# Altium PCB 小车新电机控制PCB.PcbDoc
Units mil, origin at the board's own origin, x right, y up, seen from the top; angles counter-clockwise.
Board outline 6000 x 4000 mil, 2 copper layers (Top Layer, Bottom Layer); 51 components, 50 nets, 231 pads, 17 vias.
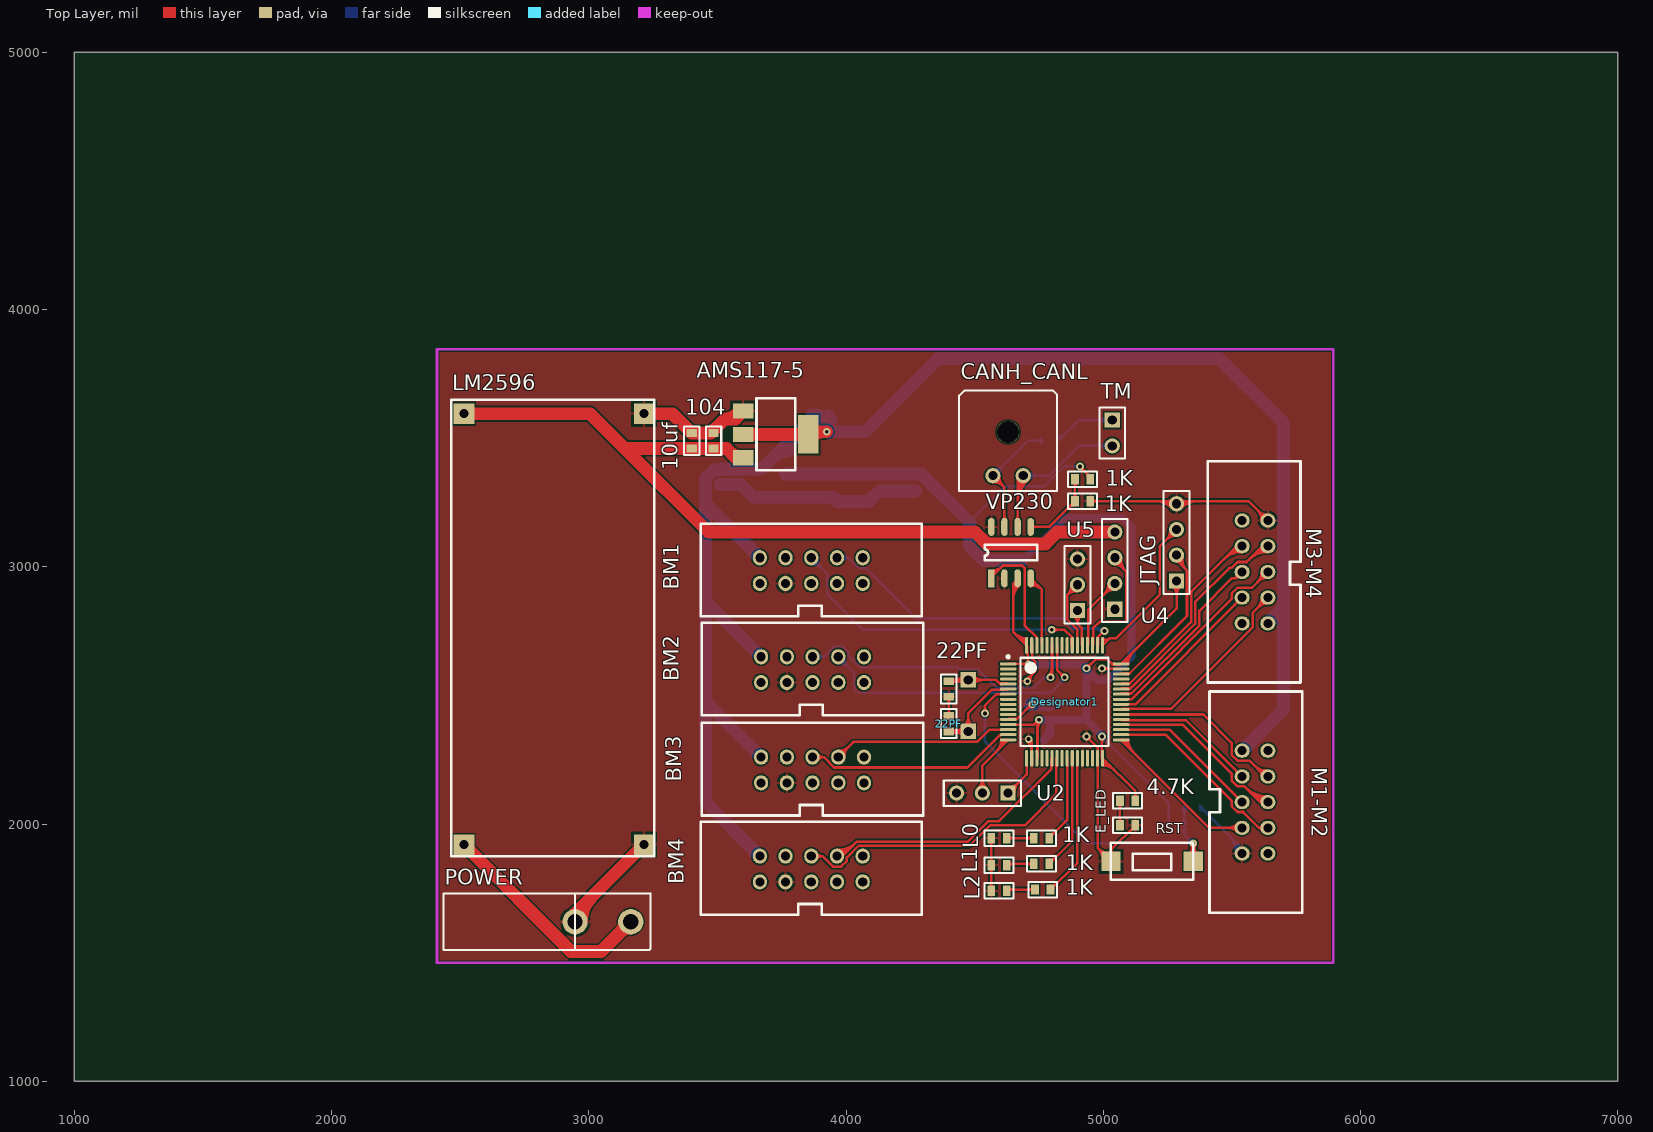
[diagram p0: Top Layer view]
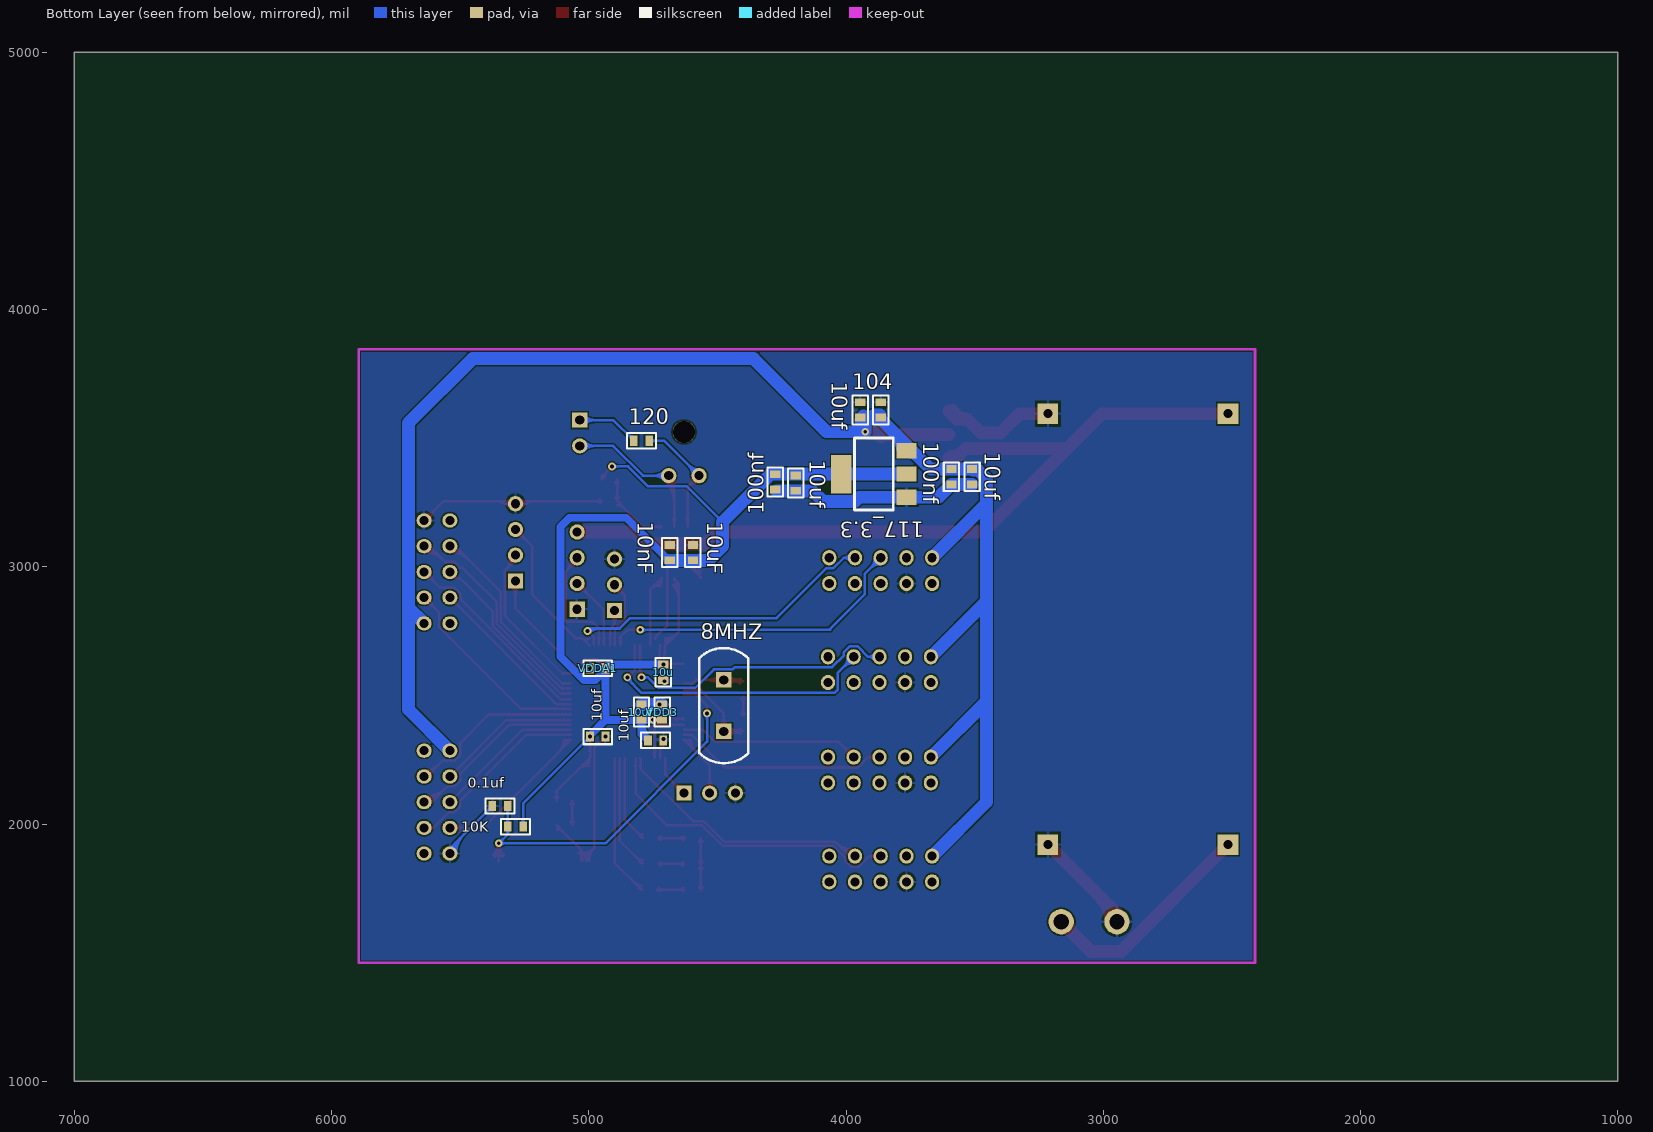
[diagram p1: Bottom Layer view, seen from below]

## Layer stack, top to bottom
Top Solder: solder mask 0.4, Solder Resist, Dk 3.5
Top Layer: signal copper 1.4
Dielectric 1: dielectric 12.6, FR-4, Dk 4.8
Bottom Layer: signal copper 1.4
Bottom Solder: solder mask 0.4, Solder Resist, Dk 3.5

## Board outline
1000,1000 7000,1000 7000,5000 1000,5000

## Design rules (kind name [scope] priority, off if disabled: settings)
Clearance [All] p1: gap=5.98
PolygonConnect [All] p1: connectstyle=Relief reliefconductorwidth=10 reliefentries=4 polygonreliefangle="90 Angle" airgapwidth=10
RoutingVias [All] p1: holewidth=20 width=30 viastyle="Through Hole" minholewidth=15 minwidth=25 maxholewidth=30 maxwidth=30
SolderMaskExpansion [All] p1: expansion=4
Width [All] p1: maxlimit=50 minlimit=10 preferedwidth=10
29 further rules are at their usual default settings.

## Classes and differential pairs
component class STM32电机: 0.1uf 1K 4.7K 8MHZ 10K 10nF 10uF 10uf 22PF 100nf 104 117_3.3 120 AMS117-5 BM1 BM2 BM3 BM4 CANH_CANL E_LED JTAG L0 L1 L2 LM2596 M1-M2 M3-M4 POWER RST TM U2 U4 U5 VDD3 VDDA1 VP230

## Components (designator, comment, footprint, x,y, rotation, side; value= is the part's Value field where it differs from the comment)
0.1uf "0.1uf" 0603_WYH 5345,2070 r0 bottom (schematic designator C_RST_0.1uf)
1K "10K" 0603_WYH 4765,1745 r180 top (schematic designator LS2_1K)
1K "10K" 0603_WYH 4760,1845 r180 top (schematic designator LS1_1K)
1K "10K" 0603_WYH 4760,1945 r180 top (schematic designator LS0_1K)
1K "1k" 0603_WYH 4920,3255 r0 top (schematic designator CANR2)
1K "1k" 0603_WYH 4920,3340 r0 top (schematic designator CANR1)
4.7K "4.7K" 0603_WYH 5095,2090 r0 top (schematic designator R_LED_4.7K)
8MHZ "XTAL" XTAL_D 4475,2560 r270 bottom
10K "R_10K" 0603_WYH 5285,1990 r0 bottom (schematic designator R_RST_10K)
10nF "10nF" 0603_WYH 4685,3055 r270 bottom (schematic designator C_CAN_10nF)
10u "100nf" 0603_WYH 4710,2590 r270 bottom (schematic designator VDD1)
10uf "100nf" 0603_WYH 4965,2340 r180 bottom (schematic designator VDDA2)
10uf "100nf" 0603_WYH 4740,2325 r180 bottom (schematic designator VDD4)
10uf "100nf" 0603_WYH 4795,2435 r90 bottom (schematic designator VDD2)
10uF "10uF" 0603_WYH 4595,3055 r270 bottom (schematic designator C_CAN_10uF)
10uf "10uF" 0603_WYH 3945,3610 r90 bottom (schematic designator "C4 10uf")
10uf "10uF" 0603_WYH 3400,3490 r90 top (schematic designator "C3 10uf")
10uf "10uf" 0603_WYH 3510,3350 r270 bottom (schematic designator C6_10uf)
10uf "10uf" 0603_WYH 4194.96,3325 r270 bottom (schematic designator C4_10uf)
22PF "22pf" 0603_WYH 4400,2390 r270 top (schematic designator C2_22PF)
22PF "22pf" 0603_WYH 4400,2525 r90 top (schematic designator C1_22PF)
100nf "C_100nf" 0603_WYH 3590,3350 r270 bottom (schematic designator C7_100nf)
100nf "C_100nf" 0603_WYH 4275,3330 r270 bottom (schematic designator C5_100nf)
104 "100nF" 0603_WYH 3865.04,3610 r90 bottom (schematic designator "C4 104")
104 "100nF" 0603_WYH 3485,3490 r90 top (schematic designator "C3 104")
117_3.3 "1117_WYN" SOT-223_WYN 3765,3270 r90 bottom (schematic designator 1117_3.3)
120 "R_120" 0603_WYH 4795,3490 r0 bottom (schematic designator R6_120)
AMS117-5 "1117-3.3" SOT-223_WYN 3600,3605 r270 top
BM1 "2*5BM" JTAG_10to20 3865,2935 r90 top
BM2 "2*5BM" JTAG_10to20 3870,2550 r90 top
BM3 "2*5BM" JTAG_10to20 3870,2160 r90 top
BM4 "2*5BM" JTAG_10to20 3865,1775 r90 top
CANH_CANL "CAN_HEADER" CAN信号 4630,3295 r90 top
Designator1 "Comment" STM32TSQFP50P1200X1200X160-64N 4850,2475 r0 top
E_LED "LED_WYN" 0603_WYH 5095,1995 r0 top
JTAG "2_JTAG" 2_JTAG 5285,2945 r90 top
L0 "LED_WYN" 0603_WYH 4595,1945 r180 top
L1 "LED_WYN" 0603_WYH 4595,1840 r180 top
L2 "LED_WYN" 0603_WYH 4595,1740 r180 top
LM2596 "LM2596" LM2596 2515,1925 r90 top
M1-M2 "M1-M2" JTAG_10to20 5540,2085 r0 top
M3-M4 "M3-M4" JTAG_10to20 5640,2980 r180 top
POWER "power" power 2435,1620 r0 top
RST "RST_BUTTON" CLCK 5350,1855 r180 top (schematic designator RST_BUTTON)
TM "Header2" HDR1X2 5035,3570 r270 top
U2 "三针串口" HDR1X3 4530,2120 r180 top
U4 "Header-4" HDR1X4 5045,2835 r90 top (schematic designator USART4)
U5 "Header-3" HDR1X3 4900,2930 r90 top (schematic designator USART5)
VDD3 "10uf" 0603_WYH 4715,2435 r90 bottom
VDDA1 "10uf" 0603_WYH 4965,2605 r0 bottom
VP230 "VP230" VP230 4565,2955 r90 top

## Footprints (in the part's own frame and the unit in brackets; to place one, negate y for a bottom-side part, rotate by r counter-clockwise, add the part's x,y. Pads: shape width x height; smd on the part's side, far side on the other; paste and mask are expansions set on the pad)
2_JTAG [mm]
  rect 1.5x1.5 hole 0.9: 1(0,0)
  round 1.5 hole 0.9: 2(2.54,0) 3(5.08,0) 4(7.62,0)
  silkscreen extent -1.27,-1.27 8.89,1.27
0603_WYH [mil]
  rect 30x40 smd: 1(-30,0) 2(30,0)
  silkscreen extent -56,-30 56,30
CAN信号 [mm]
  round 1.5 hole 0.9: 1(1.5,1.5) 2(1.5,-1.5)
  round 2.2 hole 2.2: 3(5.82,0)
  silkscreen extent 0,-4.83 9.91,4.83
CLCK [mil]
  rect 75x75 smd: 1(0,0) 2(320,0)
  silkscreen extent 0,-72 320,72
HDR1X2 [mm]
  rect 1.5x1.5 hole 0.9: 1(0,0)
  round 1.5 hole 0.9: 2(2.54,0)
  silkscreen extent -1.27,-1.27 3.81,1.27
HDR1X3 [mm] "Connector; Header; 3 Position"
  rect 1.5x1.5 hole 0.9: 1(-2.54,0)
  round 1.5 hole 0.9: 2(0,0) 3(2.54,0)
  silkscreen extent -3.81,-1.27 3.81,1.27
HDR1X4 [mm] "Connector; Header; 4 Position"
  rect 1.5x1.5 hole 0.9: 1(0,0)
  round 1.5 hole 0.9: 2(2.54,0) 3(5.08,0) 4(7.62,0)
  silkscreen extent -1.27,-1.27 8.89,1.27
JTAG_10to20 [mil]
  oval 59x55 hole 35.4: 1(0,200) 2(0,100) 3(0,0) 4(0,-100) 5(0,-200) 6(100,-200) 7(100,-100) 8(100,0) 9(100,100) 10(100,200)
  silkscreen extent -127,-430 233,430
LM2596 [mil]
  rect 80x80 hole 35: 1(-5,0) 2(-5,-700) 3(1670,0) 4(1670,-700)
  silkscreen extent -50,-740 1725,50
power [mm]
  round 2.5 hole 1.5: 1(18.5,0) 2(13,0)
  silkscreen extent 0,-2.8 20.45,2.8
SOT-223_WYN [mil]
  rect 59x79 smd: 1(0,0) 2(90.55,0) 3(181.1,0)
  rect 150x79 smd: 4(89.88,253.54)
  silkscreen extent -49,52 231,202
STM32TSQFP50P1200X1200X160-64N [mm] "TSQFP, 64-Leads, Body 12.0x12.0mm (max), Pitch 0.50mm, IPC Medium Density"
  oval 1.65x0.3 smd: 1(-5.575,3.75) 2(-5.575,3.25) 3(-5.575,2.75) 4(-5.575,2.25) 5(-5.575,1.75) 6(-5.575,1.25) 7(-5.575,0.75) 8(-5.575,0.25) 9(-5.575,-0.25) 10(-5.575,-0.75) 11(-5.575,-1.25) 12(-5.575,-1.75) 13(-5.575,-2.25) 14(-5.575,-2.75) 15(-5.575,-3.25) 16(-5.575,-3.75) 33(5.575,-3.75) 34(5.575,-3.25) 35(5.575,-2.75) 36(5.575,-2.25) 37(5.575,-1.75) 38(5.575,-1.25) 39(5.575,-0.75) 40(5.575,-0.25) 41(5.575,0.25) 42(5.575,0.75) 43(5.575,1.25) 44(5.575,1.75) 45(5.575,2.25) 46(5.575,2.75) 47(5.575,3.25) 48(5.575,3.75)
  oval 0.3x1.65 smd: 17(-3.75,-5.575) 18(-3.25,-5.575) 19(-2.75,-5.575) 20(-2.25,-5.575) 21(-1.75,-5.575) 22(-1.25,-5.575) 23(-0.75,-5.575) 24(-0.25,-5.575) 25(0.25,-5.575) 26(0.75,-5.575) 27(1.25,-5.575) 28(1.75,-5.575) 29(2.25,-5.575) 30(2.75,-5.575) 31(3.25,-5.575) 32(3.75,-5.575) 49(3.75,5.575) 50(3.25,5.575) 51(2.75,5.575) 52(2.25,5.575) 53(1.75,5.575) 54(1.25,5.575) 55(0.75,5.575) 56(0.25,5.575) 57(-0.25,5.575) 58(-0.75,5.575) 59(-1.25,5.575) 60(-1.75,5.575) 61(-2.25,5.575) 62(-2.75,5.575) 63(-3.25,5.575) 64(-3.75,5.575)
  silkscreen extent -5.7,-4.35 4.35,4.57, body extent -5,-5 5,5, height 1.6
VP230 [mil]
  rect 70x25 smd: 1(0,0)
  oval 70x25 smd: 2(0,-51) 3(0,-102) 4(0,-153) 5(200,-153) 6(200,-102) 7(200,-51) 8(200,0)
  silkscreen extent 70,-178 130,26
XTAL_D [mil]
  rect 60x60 hole 36 paste+0: 1(0,0) 2(200,0)
  silkscreen extent -124,-95 324,95

## Part data
0.1uf 10nF 10u 10uf 10uf 10uf 10uF 10uf 10uf 22PF 22PF 100nf 100nf 104 104 VDD3 VDDA1: library part CAP_WYN
1K 1K 1K 1K 1K 10K 120: library part R
4.7K: library part RES_WYN
10uf 10uf: library part CAP_POL_WYN
AMS117-5: library part 1117_WYN
M1-M2 M3-M4: library part 电机接口

## Via types
v1: diameter 30, hole 15, Top Layer to Bottom Layer, 17 vias

## Nets (pads, with @x,y where several pads share a name; then routed paths per layer and width w, separated by ;. In a path a pad name is that pad's centre, name@x,y a point inside that pad or via, vN(x,y) a via of type N, cw(c..) or ccw(c..) an arc to the next point about the centre after c; other vN are vias at no path point)
B1_PA15: BM1.7 Designator1.50 | length 1364
  Top Layer w10: Designator1.50@4977.44,2721.81 ccw(c4973.19,2728.06) 4980.75,2728.06 ; Designator1.50@4978.86,2721.06 cw(c4991.19,2721.06) 4982.47,2729.78 ; Designator1.50@4978.83,2721.27 cw(c4985.85,2722.96) 4980.75,2728.06 ; Designator1.50@4980.75,2697.28 4980.75,2728.06 ; v1(5005,2750) 5002.69,2750 4980.75,2728.06
  Bottom Layer w10: BM1.7 4008.57,3035 4049.06,2994.52 4075.48,2994.52 4270,2800 4840,2800 4880,2760 v1@4995,2760 ; BM1.7@3983.35,3021.97 cw(c4008.57,3004.06) 4008.57,3035 cw(c4008.57,3065.94) BM1.7@3983.35,3048.03 ; 4956.72,2760 cw(c4956.72,2701.72) v1@4997.93,2742.93 ; 4980.86,2760 cw(c4980.86,2725.86) v1(5005,2750)
B1_PB3: BM1.8 Designator1.55 | length 1434
  Top Layer w10: v1(4800,2755) 4849.79,2755 4876.73,2728.06 ; v1@4807.07,2747.93 cw(c4824.14,2730.86) 4824.14,2755 cw(c4824.14,2779.14) v1@4807.07,2762.07 ; 4875.01,2729.78 cw(c4866.29,2721.06) Designator1.55@4878.62,2721.06 ; Designator1.55@4876.73,2697.28 4876.73,2728.06 ; Designator1.55@4878.65,2721.27 ccw(c4871.63,2722.96) 4876.73,2728.06 ; Designator1.55@4880.04,2721.81 cw(c4884.29,2728.06) 4876.73,2728.06
  Bottom Layer w10: BM1.8@3865,3010.5 cw(c3865,2951.35) 3906.82,2993.18 ; BM1.8@3865,3020.5 cw(c3865,2985.49) 3889.75,3010.25 ; BM1.8 3926.52,2973.48 3926.52,2894.52 4066.03,2755 ; BM1.8@3887.5,3033 ccw(c3936.99,3033) 3902,2998 ; 4061.03,2755 4066.03,2755 ; v1@4792.93,2747.93 ccw(c4775.86,2730.86) 4775.86,2755 ccw(c4775.86,2779.14) v1@4792.93,2762.07 ; v1(4800,2755) 4066.03,2755
B2_PA6: BM4.7 Designator1.22 | length 1205.8
  Top Layer w10: BM4.7@3965.01,1879.5 ccw(c3965.13,1940.68) 4008.39,1897.42 ; BM4.7@3965.03,1889.5 ccw(c3965.2,1974.66) 4025.41,1914.44 ; BM4.7@3965.05,1899.5 ccw(c3965.26,2008.63) 4042.43,1931.46 ; BM4.7@3985.97,1875 4042.44,1931.47 ; 4797.99,2220 cw(c4809.72,2220) Designator1.22@4801.43,2228.3 ; Designator1.22 4797.99,2252.72 4797.99,2213.4 4595.57,2010.98 4553.34,2010.98 4473.82,1931.47 4042.44,1931.47
B2_PA7: BM4.8 Designator1.23 | length 1297.5
  Top Layer w10: BM4.8 3908.57,1875 3949.06,1834.52 3980.94,1834.52 4003.48,1857.06 4003.48,1869.91 4049.06,1915.48 4480.44,1915.48 4559.96,1995 4695,1995 4817.68,2117.68 Designator1.23@4817.68,2252.72 ; BM4.8@3883.35,1861.97 cw(c3908.57,1844.06) 3908.57,1875 cw(c3908.57,1905.94) BM4.8@3883.35,1888.03 ; 4817.68,2220 cw(c4829.41,2220) Designator1.23@4821.11,2228.3
B3_PB6: BM2.7 Designator1.58 | length 1329.6
  Top Layer w10: Designator1.58 4820.47,2599.53 v1(4850,2570) ; v1@4840,2570 ccw(c4815.86,2570) 4832.93,2587.07 ccw(c4850,2604.14) v1@4850,2580
  Bottom Layer w10: BM2.7@3970,2625.5 cw(c3970,2566.35) 4011.82,2608.18 ; BM2.7@3970,2635.5 cw(c3970,2600.49) 3994.75,2625.25 ; BM2.7 4031.52,2588.48 4031.52,2523.57 4045.57,2509.52 4085.94,2509.52 4086.43,2510 4795,2510 4850,2565 v1(4850,2570) ; BM2.7@3992.5,2648 ccw(c4041.99,2648) 4007,2613 ; 4829.39,2544.39 ccw(c4803.79,2570) v1@4840,2570 ; 4841.46,2556.46 cw(c4850,2547.93) v1@4850,2560
B3_PB7: BM2.8 Designator1.59 | length 1298.8
  Top Layer w10: v1@4787.93,2577.07 ccw(c4756.89,2608.11) 4800.79,2608.11 ; v1(4795,2570) ccw(c4781.03,2583.97) 4800.79,2583.97 ; v1@4800.79,2575.79 Designator1.59
  Bottom Layer w10: BM2.8 3913.57,2650 3954.06,2690.48 3985.94,2690.48 4008.48,2667.94 4008.48,2655.09 4054.06,2609.52 4431.92,2609.52 4440.45,2600.98 4514.02,2600.98 4585.98,2529.02 4729.55,2529.02 4770.53,2570 v1(4795,2570) ; BM2.8@3888.35,2636.97 cw(c3913.57,2619.06) 3913.57,2650 cw(c3913.57,2680.94) BM2.8@3888.35,2663.03 ; v1@4787.93,2562.93 ccw(c4770.86,2545.86) 4770.86,2570 ccw(c4770.86,2594.14) v1@4787.93,2577.07
B4_PA0: BM3.7 Designator1.14 | length 817.5
  Top Layer w10: BM3.7 4029.02,2319.02 4509.55,2319.02 4557.27,2366.73 Designator1.14 ; BM3.7@3970,2274.5 ccw(c3970,2309.51) 3994.75,2284.75 ; BM3.7@3970,2284.5 ccw(c3970,2343.65) 4011.82,2301.82 ; BM3.7@3992.5,2262 cw(c4041.99,2262) 4007,2297
B4_PA1: BM3.8 Designator1.15 | length 898.8
  Top Layer w10: BM3.8 3913.57,2260 3954.06,2219.52 4472.2,2219.52 4599.74,2347.05 Designator1.15 ; BM3.8@3888.35,2246.97 cw(c3913.57,2229.06) 3913.57,2260 cw(c3913.57,2290.94) BM3.8@3888.35,2273.03 ; 4595.22,2342.53 cw(c4603.94,2333.81) Designator1.15@4603.94,2346.14
CANH: 120.1 CANH_CANL.1 VP230.7 | length 830.7
  Top Layer w10: CANH_CANL.1@4570.94,3329.53 cw(c4570.94,3270.31) 4612.82,3312.18 cw(c4654.69,3354.06) CANH_CANL.1@4595.47,3354.06 ; CANH_CANL.1@4570.94,3339.53 cw(c4570.94,3304.46) 4595.74,3329.26 cw(c4620.54,3354.06) CANH_CANL.1@4585.47,3354.06 ; CANH_CANL.1 4616,3309 VP230.7 ; VP230.7@4610.7,3182.8 ccw(c4597.89,3195.61) 4616,3195.61 ccw(c4634.11,3195.61) VP230.7@4621.3,3182.8
  Bottom Layer w10: CANH_CANL.1 4706.89,3490 120.1 ; CANH_CANL.1@4570.94,3368.58 ccw(c4570.94,3403.66) 4595.74,3378.86 ccw(c4620.54,3354.06) CANH_CANL.1@4585.47,3354.06 ; CANH_CANL.1@4570.94,3378.58 ccw(c4570.94,3437.8) 4612.82,3395.93 ccw(c4654.69,3354.06) CANH_CANL.1@4595.47,3354.06 ; 120.1@4757.93,3482.93 ccw(c4740.86,3465.86) 4740.86,3490 ccw(c4740.86,3514.14) 120.1@4757.93,3497.07
CANL: CANH_CANL.2 TM.2 VP230.6 | length 1255.8
  Top Layer w10: VP230.6@4661.7,3182.8 ccw(c4648.89,3195.61) 4667,3195.61 ccw(c4685.11,3195.61) VP230.6@4672.3,3182.8 ; VP230.6 4667,3332 ; 4667,3241.59 cw(c4801.52,3241.59) CANH_CANL.2@4706.4,3336.71 ; 4667,3265.74 cw(c4777.37,3265.74) CANH_CANL.2@4699.33,3343.78 ; 4667,3289.88 cw(c4753.23,3289.88) CANH_CANL.2@4692.26,3350.85 ; 4667,3314.02 cw(c4729.09,3314.02) CANH_CANL.2@4685.19,3357.92 ; CANH_CANL.2@4668.11,3341.29 cw(c4661.65,3337.35) 4667,3332 ; CANH_CANL.2@4676.29,3333.11 ccw(c4672.35,3326.65) 4667,3332 ; CANH_CANL.2 4667,3332
  Bottom Layer w10: CANH_CANL.2 4789.06,3354.06 4905,3470 TM.2 ; CANH_CANL.2@4699.33,3343.78 cw(c4724.13,3318.98) 4724.13,3354.06 cw(c4724.13,3389.13) CANH_CANL.2@4699.33,3364.33 ; CANH_CANL.2@4706.4,3336.71 cw(c4748.27,3294.84) 4748.27,3354.06 cw(c4748.27,3413.27) CANH_CANL.2@4706.4,3371.4 ; TM.2@5017.66,3452.66 ccw(c4975.79,3410.79) 4975.79,3470 ccw(c4975.79,3529.21) TM.2@5017.66,3487.34 ; TM.2@5024.73,3459.73 ccw(c4999.93,3434.93) 4999.93,3470 ccw(c4999.93,3505.07) TM.2@5024.73,3480.27
CANRX: Designator1.61 VP230.4 | length 383.4
  Top Layer w10: VP230.4@4714.3,2954.69 cw(c4715.41,2948.02) VP230.4@4720.2,2952.8 ; VP230.4@4715.94,2944.83 cw(c4719.34,2924.47) 4733.94,2939.06 ; VP230.4@4717.59,2934.97 cw(c4723.26,2900.91) 4747.68,2925.32 ; VP230.4 4761.42,2911.58 ; VP230.4@4719.23,2925.1 cw(c4727.19,2877.36) 4761.42,2911.58 ; Designator1.61 4761.42,2911.58
CANTX: Designator1.62 VP230.1 | length 532.4
  Top Layer w10: VP230.1 4565,2960 4610,3005 4685,3005 4694.52,2995.48 4694.52,2772.48 Designator1.62@4741.73,2725.26 ; VP230.1@4565,2975 ccw(c4565,3011.21) 4590.61,2985.61 ; VP230.1@4565,2985 ccw(c4565,3045.36) 4607.68,3002.68 ; 4737.22,2729.78 cw(c4728.5,2721.06) Designator1.62@4740.83,2721.06
GND: 0.1uf.2 1K.2@4950,3255 10nF.1 10u.2 10uF.1 10uf.2 22PF.1 100nf.2 104.2 117_3.3.1 AMS117-5.1 BM1.2 BM2.2 BM3.2 BM4.2 Designator1.12 Designator1.18 Designator1.28 Designator1.31 Designator1.47 Designator1.63 E_LED.2 JTAG.4 L0.2 L1.2 L2.2 LM2596.2 LM2596.4 M1-M2.5 M3-M4.5 POWER.2 RST.2 U2.3 U4.1 U5.3 VDD3.2 VDDA1.2 VP230.2 VP230.8 | length 5814
  Top Layer w10: 22PF.1@4392.93,2427.07 ccw(c4375.86,2444.14) 4400,2444.14 ccw(c4424.14,2444.14) 22PF.1@4407.07,2427.07 ; 22PF.1@4392.93,2487.93 cw(c4375.86,2470.86) 4400,2470.86 cw(c4424.14,2470.86) 22PF.1@4407.07,2487.93 ; 22PF.1@4400,2420 22PF.1@4400,2495 ; L2.2@4557.93,1752.07 ccw(c4540.86,1769.14) 4565,1769.14 ccw(c4589.14,1769.14) L2.2@4572.07,1752.07 ; L1.2@4557.93,1827.93 cw(c4540.86,1810.86) 4565,1810.86 cw(c4589.14,1810.86) L1.2@4572.07,1827.93 ; L1.2@4557.93,1852.07 ccw(c4540.86,1869.14) 4565,1869.14 ccw(c4589.14,1869.14) L1.2@4572.07,1852.07 ; L0.2@4557.93,1932.93 cw(c4540.86,1915.86) 4565,1915.86 cw(c4589.14,1915.86) L0.2@4572.07,1932.93 ; L2.2 L1.2 L0.2 ; Designator1.12 4633.31,2408.9 4664.08,2408.9 ; Designator1.12@4657.09,2407.01 ccw(c4657.09,2419.34) 4665.8,2410.62 ; Designator1.12@4657.3,2406.98 ccw(c4658.98,2414) 4664.08,2408.9 ; Designator1.12@4657.84,2405.59 cw(c4664.08,2401.34) 4664.08,2408.9 ; 4699.71,2444.52 cw(c4725,2419.23) v1@4725,2455 ; v1@4702.93,2322.93 cw(c4656.77,2276.77) Designator1.18@4722.05,2276.77 ; v1(4705,2555) cw(c4727.49,2555) 4711.59,2570.9 ; v1@4705,2564.32 4735.98,2595.3 4735.98,2630.76 4723.35,2643.4 4723.35,2693.19 Designator1.63 ; 4711.33,2456.15 ccw(c4702.48,2465) v1@4715,2465 ; v1@4712.73,2320.38 cw(c4715.32,2311.23) 4722.05,2317.95 ; v1@4715,2555 cw(c4761.63,2555) 4728.66,2587.97 ; v1@4719.62,2327.27 ccw(c4728.77,2324.68) 4722.05,2317.95 ; v1@4720.18,2465 4664.08,2408.9 ; Designator1.18 4722.05,2317.95 ; 4722.05,2300.92 ccw(c4680.92,2300.92) v1(4710,2330) 4722.05,2317.95 ; v1@4935,2330 cw(c4935,2305.86) 4952.07,2322.93 cw(c4969.14,2340) v1@4945,2340 ; v1(4935,2340) 4977.95,2297.05 Designator1.31 4977.95,1907.05 ; 1K.2@4950,3255 5565,3255 M3-M4.5 ; 1K.2@4957.07,3247.93 cw(c4974.14,3230.86) 4974.14,3255 cw(c4974.14,3279.14) 1K.2@4957.07,3262.07 ; v1(4995,2605) 4996.14,2603.86 Designator1.47@5068.58,2603.86 ; RST.2@4997.53,1856.5 ccw(c4930.51,1859.6) 4977.96,1907.04 ; v1@5002.07,2597.93 cw(c5016.39,2583.61) 5016.39,2603.86 ; v1@5002.07,2612.07 ccw(c5021.9,2631.9) 5021.9,2603.86 ; RST.2@5007.52,1856.04 ccw(c4961.12,1858.19) 4993.97,1891.03 ccw(c5026.81,1923.88) RST.2@5028.96,1877.48 ; RST.2@5019.78,1885.85 ccw(c5015.1,1900) 5030,1900 ; RST.2@5028.5,1887.47 cw(c5025.4,1954.49) 4977.96,1907.04 ; RST.2@5040.22,1885.85 cw(c5044.9,1900) 5030,1900 ; 5099.39,1969.39 cw(c5125,1943.79) E_LED.2@5125,1980 ; E_LED.2@5111.47,1981.46 ccw(c5102.93,1990) E_LED.2@5115,1990 ; E_LED.2 5030,1900 ; 5201.64,3255 cw(c5201.64,3161.64) JTAG.4@5267.66,3227.66 ; 5225.78,3255 cw(c5225.78,3185.78) JTAG.4@5274.73,3234.73 ; JTAG.4@5267.66,3262.34 cw(c5249.93,3280.07) 5249.93,3255 cw(c5249.93,3209.93) JTAG.4@5281.8,3241.8 ; JTAG.4@5288.2,3241.8 cw(c5320.07,3209.93) 5320.07,3255 cw(c5320.07,3280.07) JTAG.4@5302.34,3262.34 ; JTAG.4@5295.27,3234.73 cw(c5344.22,3185.78) 5344.22,3255 ; JTAG.4@5302.34,3227.66 cw(c5368.36,3161.64) 5368.36,3255 ; 5598.18,3221.82 cw(c5556.35,3180) M3-M4.5@5615.5,3180 ; 5603,3217 ccw(c5638,3251.99) M3-M4.5@5638,3202.5 ; 5615.25,3204.75 cw(c5590.49,3180) M3-M4.5@5625.5,3180 ; 4977.95,1907.05 RST.2 5030,1900
  Top Layer w50: POWER.2 2946.81,1651.81 LM2596.2 ; POWER.2@2971.02,1620 cw(c3106.28,1620) 3010.64,1715.64 ; LM2596.4 3325,3595 3400,3520 3474.58,3520 3529.52,3574.93 ; AMS117-5.1@3586.12,3607.28 cw(c3529.52,3640.63) 3529.52,3574.93 ; AMS117-5.1 3569.93,3574.93 3529.52,3574.93
  Bottom Layer w10: 0.1uf.2@5375,2055 cw(c5375,2018.79) 5400.61,2044.39 ; 0.1uf.2 M1-M2.5@5540,1905 ; 0.1uf.2@5385,2065 ccw(c5397.07,2065) 0.1uf.2@5388.54,2056.46 ; 5484.03,1960.97 cw(c5408.07,1885) M1-M2.5@5515.5,1885 ; 5501.1,1943.9 cw(c5442.21,1885) M1-M2.5@5525.5,1885 ; 5518.18,1926.82 cw(c5476.35,1885) M1-M2.5@5535.5,1885
  Bottom Layer w50: 10uf.2@3510,3320 3590,3320 3640,3270 117_3.3.1 3950.11,3270 3966.21,3253.9 4088.9,3253.9 4130,3295 4194.96,3295 100nf.2@4270,3295 ; VDD3.2 10uf.2@4795,2465
  other v1: 4725,2465
JTCK: Designator1.49 JTAG.3 | length 761.5
  Top Layer w10: Designator1.49 5025.12,2721.97 ; Designator1.49@4998.27,2721.72 ccw(c5011.56,2735.52) 5025.12,2721.97 ; JTAG.3@5260.47,3145 cw(c5201.26,3145) 5243.13,3103.13 cw(c5285,3061.26) JTAG.3@5285,3120.47 ; JTAG.3@5270.47,3145 cw(c5235.4,3145) 5260.2,3120.2 cw(c5285,3095.4) JTAG.3@5285,3130.47 ; JTAG.3 5220,3080 5220,2892.81 5049.16,2721.97 5025.12,2721.97
JTMS: Designator1.46 JTAG.2 | length 779.3
  Top Layer w10: Designator1.46 5072.28,2586.06 5103.06,2586.06 ; Designator1.46@5096.06,2584.17 ccw(c5096.06,2596.5) 5104.78,2587.78 ; Designator1.46@5096.27,2584.15 ccw(c5097.96,2591.16) 5103.06,2586.06 ; Designator1.46@5096.81,2582.76 cw(c5103.06,2578.51) 5103.06,2586.06 ; JTAG.2@5285,3020.47 cw(c5285,3007.07) 5294.48,3016.55 ; JTAG.2 5285,3026.02 5325.51,2985.51 ; JTAG.2@5289.44,3044.1 ccw(c5324.33,3037.04) 5299.16,3011.87 ; JTAG.2@5299.24,3042.12 ccw(c5346.25,3032.6) 5312.33,2998.69 ; JTAG.2@5309.04,3040.13 ccw(c5368.16,3028.17) 5325.51,2985.51 ; 5103.06,2586.06 5325.51,2808.52 5325.51,2985.51
JTRST: Designator1.56
LS0: 1K.1@4790,1945 Designator1.25 | length 377.4
  Top Layer w10: 1K.1@4790,1945 4859.84,2014.84 Designator1.25 ; 1K.1@4790,1960 ccw(c4790,1996.21) 4815.61,1970.61 ; 1K.1@4800,1950 cw(c4812.07,1950) 1K.1@4803.53,1958.54
LS1: 1K.1@4790,1845 Designator1.26 | length 485.5
  Top Layer w10: 1K.1@4790,1845 4879.53,1934.53 Designator1.26 ; 1K.1@4790,1860 ccw(c4790,1896.21) 4815.61,1870.61 ; 1K.1@4800,1850 cw(c4812.07,1850) 1K.1@4803.53,1858.54
LS2: 1K.1@4795,1745 Designator1.27 | length 591.6
  Top Layer w10: 1K.1@4795,1745 4899.21,1849.21 Designator1.27 ; 1K.1@4795,1760 ccw(c4795,1796.21) 4820.61,1770.61 ; 1K.1@4805,1750 cw(c4817.07,1750) 1K.1@4808.53,1758.54
M1_PC6: Designator1.37 M1-M2.2 | length 567.4
  Top Layer w10: Designator1.37@5072.28,2403.31 5321.69,2403.31 M1-M2.2 ; Designator1.37@5096.7,2406.74 ccw(c5105,2415.04) 5105,2403.31
M2_PC7: Designator1.38 M1-M2.9 | length 821.6
  Top Layer w10: Designator1.38 5389.21,2425.79 5499.52,2315.48 5499.52,2269.06 5522.06,2246.52 5568.48,2246.52 5630,2185 M1-M2.9 ; 5585.93,2229.07 ccw(c5638,2281.13) M1-M2.9@5638,2207.5 ; 5603,2212 ccw(c5638,2246.99) M1-M2.9@5638,2197.5 ; 5605.25,2209.75 cw(c5580.49,2185) M1-M2.9@5615.5,2185
M3_PC8: Designator1.39 M3-M4.2 | length 905.6
  Top Layer w10: Designator1.39 5072.28,2448.27 5264.69,2448.27 5580.48,2764.06 5580.48,2820.48 M3-M4.2 ; Designator1.39@5096.7,2444.83 cw(c5105,2436.54) 5105,2448.27 ; 5598.18,2838.18 ccw(c5556.35,2880) M3-M4.2@5615.5,2880 ; 5603,2843 cw(c5638,2808.01) M3-M4.2@5638,2857.5 ; 5615.25,2855.25 ccw(c5590.49,2880) M3-M4.2@5625.5,2880
M4_PC9: Designator1.40 M3-M4.9 | length 642.3
  Top Layer w10: Designator1.40 5125.16,2465.16 M3-M4.9
M_PA8: Designator1.41 M3-M4.3 | length 900.5
  Top Layer w10: Designator1.41 5109.02,2484.84 5499.52,2875.33 5499.52,2895.94 5522.06,2918.48 5578.48,2918.48 M3-M4.3 ; 5598.18,2938.18 ccw(c5556.35,2980) M3-M4.3@5615.5,2980 ; 5603,2943 cw(c5638,2908.01) M3-M4.3@5638,2957.5 ; 5615.25,2955.25 ccw(c5590.49,2980) M3-M4.3@5625.5,2980
M_PA9: Designator1.42 M3-M4.8 | length 737.6
  Top Layer w10: Designator1.42@5072.28,2507.32 5108.9,2507.32 5373.46,2771.89 5373.46,2828.46 5500.5,2955.5 5515.5,2955.5 ; Designator1.42@5096.7,2503.89 cw(c5105,2495.59) 5105,2507.32 ; M3-M4.8@5517.86,2969.97 cw(c5506.63,2964.37) 5515.5,2955.5 ; M3-M4.8@5530.38,2958.83 ccw(c5525.56,2945.44) 5515.5,2955.5 ; M3-M4.8 5515.5,2955.5
M_PA10: Designator1.43 M3-M4.4 | length 1060.1
  Top Layer w10: Designator1.43@5072.28,2527.01 5105.98,2527.01 ; Designator1.43@5096.06,2525.12 ccw(c5096.06,2544.5) 5109.76,2530.79 ; Designator1.43@5096.4,2525.05 ccw(c5099.71,2533.28) 5105.98,2527.01 ; Designator1.43@5096.7,2523.57 cw(c5105,2515.28) 5105,2527.01 ; 5567.1,3028.13 cw(c5638,2957.23) M3-M4.4@5638,3057.5 ; 5584.17,3045.2 cw(c5638,2991.38) M3-M4.4@5638,3067.5 ; 5601.24,3062.28 cw(c5638,3025.52) M3-M4.4@5638,3077.5 ; M3-M4.4 5618.97,3080 5557.45,3018.48 5522.06,3018.48 5499.52,2995.94 5490.94,2995.94 5357.48,2862.48 5357.48,2778.51 5105.98,2527.01
M_PA11: Designator1.44 M3-M4.7 | length 954.7
  Top Layer w10: Designator1.44@5072.28,2546.69 5103.06,2546.69 ; Designator1.44@5096.06,2544.8 ccw(c5096.06,2557.13) 5104.78,2548.41 ; Designator1.44@5096.27,2544.78 ccw(c5097.96,2551.79) 5103.06,2546.69 ; Designator1.44@5096.81,2543.39 cw(c5103.06,2539.14) 5103.06,2546.69 ; 5468.86,3028.86 cw(c5538,2959.72) M3-M4.7@5538,3057.5 ; 5485.93,3045.93 cw(c5538,2993.87) M3-M4.7@5538,3067.5 ; 5503,3063 cw(c5538,3028.01) M3-M4.7@5538,3077.5 ; M3-M4.7 5520,3080 5341.5,2901.5 5341.5,2785.13 5103.06,2546.69
M_PB12: Designator1.33 M1-M2.4 | length 844.5
  Top Layer w10: Designator1.33 5411.85,1985 M1-M2.4 ; Designator1.33@5076.97,2327.36 ccw(c5095.03,2327.36) 5082.26,2314.59 ; Designator1.33@5086.97,2327.36 ccw(c5129.17,2327.36) 5099.33,2297.52 ; Designator1.33@5096.97,2327.36 ccw(c5163.31,2327.36) 5116.4,2280.45 ; M1-M2.4@5522.09,1969.09 ccw(c5483.68,1930.68) 5483.68,1985 ccw(c5483.68,2039.32) M1-M2.4@5522.09,2000.91 ; M1-M2.4@5529.16,1976.16 ccw(c5507.82,1954.82) 5507.82,1985 ccw(c5507.82,2015.18) M1-M2.4@5529.16,1993.84
M_PB13: Designator1.34 M1-M2.7 | length 764
  Top Layer w10: Designator1.34 5242.95,2347.05 5499.52,2090.48 5499.52,2069.06 5522.06,2046.52 5543.48,2046.52 5605,1985 ; M1-M2.7@5617.05,1976.78 ccw(c5605,1972.05) 5605,1985 ; M1-M2.7@5617.05,1993.22 cw(c5605,1997.95) 5605,1985 ; M1-M2.7 5605,1985
M_PB14: Designator1.35 M1-M2.3 | length 587.2
  Top Layer w10: Designator1.35 5258.27,2366.73 M1-M2.3
M_PB15: Designator1.36 M1-M2.8 | length 996.8
  Top Layer w10: Designator1.36 5308.58,2386.42 5499.52,2195.48 5499.52,2169.06 5522.06,2146.52 5548.48,2146.52 5610,2085 ; 5551.79,2143.21 ccw(c5638,2229.42) M1-M2.8@5638,2107.5 ; 5568.86,2126.14 ccw(c5638,2195.28) M1-M2.8@5638,2097.5 ; 5585.93,2109.07 ccw(c5638,2161.13) M1-M2.8@5638,2087.5 ; 5603,2092 ccw(c5638,2126.99) M1-M2.8@5638,2077.5 ; M1-M2.8@5616.03,2080.16 ccw(c5610,2078.83) 5610,2085 ; M1-M2.8@5616.03,2089.84 cw(c5610,2091.17) 5610,2085 ; M1-M2.8 5610,2085
NetCANR1_1: 1K.1@4890,3255 1K.1@4890,3340 VP230.5 | length 440.6
  Top Layer w10: VP230.5 4790,3155 4890,3255 1K.1@4890,3340 ; VP230.5@4723.3,3149.7 cw(c4736.11,3136.89) 4736.11,3155 cw(c4736.11,3173.11) VP230.5@4723.3,3160.3 ; 4864.39,3229.39 cw(c4890,3203.79) 1K.1@4890,3240 ; 1K.1@4876.47,3241.46 ccw(c4867.93,3250) 1K.1@4880,3250 ; 1K.1@4882.93,3267.07 ccw(c4865.86,3284.14) 4890,3284.14 ccw(c4914.14,3284.14) 1K.1@4897.07,3267.07 ; 1K.1@4882.93,3327.93 cw(c4865.86,3310.86) 4890,3310.86 cw(c4914.14,3310.86) 1K.1@4897.07,3327.93
NetE_LED_1: 4.7K.1 E_LED.1 | length 170.8
  Top Layer w10: E_LED.1@5057.93,2007.07 ccw(c5040.86,2024.14) 5065,2024.14 ccw(c5089.14,2024.14) E_LED.1@5072.07,2007.07 ; 4.7K.1@5057.93,2077.93 cw(c5040.86,2060.86) 5065,2060.86 cw(c5089.14,2060.86) 4.7K.1@5072.07,2077.93 ; E_LED.1 4.7K.1
NetL0_1: 1K.2@4730,1945 L0.1 | length 180.8
  Top Layer w10: L0.1 1K.2@4730,1945 ; L0.1@4632.07,1937.93 cw(c4649.14,1920.86) 4649.14,1945 cw(c4649.14,1969.14) L0.1@4632.07,1952.07 ; 1K.2@4722.93,1937.93 ccw(c4705.86,1920.86) 4705.86,1945 ccw(c4705.86,1969.14) 1K.2@4722.93,1952.07
NetL1_1: 1K.2@4730,1845 L1.1 | length 175.8
  Top Layer w10: L1.1@4630,1845 1K.2@4730,1845 ; L1.1@4632.07,1837.93 cw(c4649.14,1820.86) 4649.14,1845 cw(c4649.14,1869.14) L1.1@4632.07,1852.07 ; 1K.2@4722.93,1837.93 ccw(c4705.86,1820.86) 4705.86,1845 ccw(c4705.86,1869.14) 1K.2@4722.93,1852.07
NetL2_1: 1K.2@4735,1745 L2.1 | length 180.8
  Top Layer w10: L2.1@4630,1745 1K.2@4735,1745 ; L2.1@4632.07,1737.93 cw(c4649.14,1720.86) 4649.14,1745 cw(c4649.14,1769.14) L2.1@4632.07,1752.07 ; 1K.2@4727.93,1737.93 ccw(c4710.86,1720.86) 4710.86,1745 ccw(c4710.86,1769.14) 1K.2@4727.93,1752.07
NetR6_120_2: 120.2 TM.1 | length 429.2
  Bottom Layer w10: 120.2 4905,3570 TM.1 ; 120.2@4825,3505 ccw(c4825,3541.21) 4850.61,3515.61 ; 120.2@4835,3495 cw(c4847.07,3495) 120.2@4838.54,3503.54 ; TM.1@5017.66,3552.66 ccw(c4975.79,3510.79) 4975.79,3570 ccw(c4975.79,3629.21) TM.1@5017.66,3587.34 ; TM.1@5024.73,3559.73 ccw(c4999.93,3534.93) 4999.93,3570 ccw(c4999.93,3605.07) TM.1@5024.73,3580.27
RESET: 0.1uf.1 10K.2 Designator1.7 RST.1 | length 2005.3
  Top Layer w10: v1@4532.93,2437.07 ccw(c4515.86,2454.14) 4540,2454.14 ccw(c4564.14,2454.14) v1@4547.07,2437.07 ; v1(4540,2430) 4540,2460 4584.53,2504.53 Designator1.7 ; RST.1@5329.03,1879.83 ccw(c5290.87,1925) v1(5350,1925) ; RST.1@5335.48,1872.19 ccw(c5309.07,1903.46) 5350,1903.46 ccw(c5390.93,1903.46) RST.1@5364.52,1872.19 ; v1@5341.34,1920 cw(c5320.43,1907.93) 5343.75,1901.68 cw(c5367.07,1895.44) v1@5355,1916.34 ; v1@5342.93,1917.93 cw(c5325.86,1900.86) 5350,1900.86 cw(c5374.14,1900.86) v1@5357.07,1917.93 ; v1@5345,1916.34 cw(c5332.93,1895.44) 5356.25,1901.68 cw(c5379.57,1907.93) v1@5358.66,1920 ; RST.1 v1(5350,1925) ; RST.1@5370.97,1879.83 cw(c5409.13,1925) v1(5350,1925)
  Bottom Layer w10: v1@4532.93,2422.93 cw(c4515.86,2405.86) 4540,2405.86 cw(c4564.14,2405.86) v1@4547.07,2422.93 ; v1(4540,2430) 4540,2320 4935,1925 v1(5350,1925) 5315,1960 10K.2 0.1uf.1 ; 10K.2@5307.93,1977.93 cw(c5290.86,1960.86) 5315,1960.86 cw(c5339.14,1960.86) 10K.2@5322.07,1977.93 ; 10K.2@5307.93,2002.07 ccw(c5290.86,2019.14) 5315,2019.14 ccw(c5339.14,2019.14) 10K.2@5322.07,2002.07 ; 0.1uf.1@5307.93,2057.93 cw(c5290.86,2040.86) 5315,2040.86 cw(c5339.14,2040.86) 0.1uf.1@5322.07,2057.93 ; v1@5340,1925 ccw(c5315.86,1925) 5332.93,1942.07 ccw(c5350,1959.14) v1@5350,1935 ; v1@5342.93,1917.93 ccw(c5325.86,1900.86) 5325.86,1925 ccw(c5325.86,1949.14) v1@5342.93,1932.07
U2_RX: Designator1.17 U2.1 | length 313.6
  Top Layer w10: U2.1 4702.36,2192.36 Designator1.17 ; U2.1@4630,2134.53 ccw(c4630,2169.6) 4654.8,2144.8 ccw(c4679.6,2120) U2.1@4644.53,2120 ; U2.1@4630,2144.53 ccw(c4630,2203.74) 4671.87,2161.87 ccw(c4713.74,2120) U2.1@4654.53,2120
U2_TX: Designator1.16 U2.2 | length 496.5
  Top Layer w10: U2.2@4512.66,2137.34 ccw(c4470.79,2179.21) 4530,2179.21 ccw(c4589.21,2179.21) U2.2@4547.34,2137.34 ; U2.2@4519.73,2130.27 ccw(c4494.93,2155.07) 4530,2155.07 ccw(c4565.07,2155.07) U2.2@4540.27,2130.27 ; U2.2 4530,2226.85 Designator1.16 ; 4583.6,2280.45 ccw(c4536.69,2327.36) Designator1.16@4603.03,2327.36 ; 4600.67,2297.52 ccw(c4570.83,2327.36) Designator1.16@4613.03,2327.36 ; 4617.74,2314.59 ccw(c4604.97,2327.36) Designator1.16@4623.03,2327.36
U4_RX: Designator1.52 U4.2 | length 441.9
  Top Layer w10: Designator1.52@4937.94,2721.7 ccw(c4929.65,2730) 4941.38,2730 ; Designator1.52 4941.38,2697.28 4941.38,2831.38 U4.2 ; U4.2@5020.47,2935 cw(c4961.26,2935) 5003.13,2893.13 cw(c5045,2851.26) U4.2@5045,2910.47 ; U4.2@5030.47,2935 cw(c4995.4,2935) 5020.2,2910.2 cw(c5045,2885.4) U4.2@5045,2920.47
U4_TX: Designator1.51 U4.3 | length 594
  Top Layer w10: Designator1.51@4957.63,2721.7 ccw(c4949.33,2730) 4961.06,2730 ; Designator1.51@4961.06,2697.28 4961.06,2761.06 4985.92,2785.92 5090.51,2785.92 5090.51,2979.49 ; U4.3@5045,3010.47 cw(c5045,2975.4) 5069.8,3000.2 ; U4.3@5050,3020 5090.51,2979.49 ; U4.3@5059.51,3034.31 ccw(c5110.91,3031.86) 5074.52,2995.48 ; U4.3@5069.5,3033.83 ccw(c5141.43,3030.41) 5090.51,2979.49
U5_RX: Designator1.54 U5.2 | length 409.5
  Top Layer w10: U5.2@4875.48,2929.42 cw(c4820.85,2928.13) 4859.49,2889.49 ; U5.2@4885.48,2929.66 cw(c4853.12,2928.89) 4876.01,2906.01 cw(c4898.89,2883.12) U5.2@4899.66,2915.48 ; Designator1.54 4899.21,2756.2 4859.49,2795.92 4859.49,2889.49 ; U5.2@4899.42,2905.48 ccw(c4898.13,2850.85) 4859.49,2889.49 ; U5.2 4859.49,2889.49
U5_TX: Designator1.53 U5.1 | length 272.8
  Top Layer w10: U5.1@4884.41,2811.07 cw(c4857.18,2778.02) 4900,2778.02 ; U5.1@4890.76,2818.79 cw(c4874.64,2799.21) 4900,2799.21 cw(c4925.36,2799.21) U5.1@4909.24,2818.79 ; U5.1 4900,2778.02 ; U5.1@4915.59,2811.07 ccw(c4942.82,2778.02) 4900,2778.02 ; 4916.1,2730 ccw(c4927.83,2730) Designator1.53@4919.54,2721.7 ; Designator1.53 4916.1,2697.28 4916.1,2761.91 4900,2778.02
VCC_3.3V: 1K.2@4950,3340 4.7K.2 10K.1 10nF.2 10u.1 10uf.1@4194.96,3355 10uf.1@4770,2325 10uf.1@4795,2405 10uf.1@4995,2340 10uF.2 100nf.1@4275,3360 117_3.3.2 117_3.3.4 Designator1.1 Designator1.13 Designator1.19 Designator1.32 Designator1.48 Designator1.64 JTAG.1 VDD3.1 VDDA1.1 VP230.3 | length 6996.2
  Top Layer w10: Designator1.13 4731.42,2386.42 4744.53,2399.53 Designator1.19@4744.53,2258.31 ; Designator1.1 4707.36,2622.64 4707.36,2658.71 4705.16,2660.92 ; 4650,2873.35 cw(c4726.15,2873.35) VP230.3@4672.3,2927.2 ; 4650,2897.49 cw(c4702.01,2897.49) VP230.3@4665.23,2934.27 ; 4650,2921.64 cw(c4677.86,2921.64) VP230.3@4658.16,2941.34 ; 4655.45,2741.4 ccw(c4702.36,2788.31) Designator1.64@4702.36,2721.97 ; VP230.3 4667,2950.29 4650,2933.29 4650,2746.85 Designator1.64 ; 4672.52,2724.33 ccw(c4702.36,2754.17) Designator1.64@4702.36,2711.97 ; 4679.49,2622.64 cw(c4679.49,2589.49) v1@4702.93,2612.93 ; 4689.59,2707.26 ccw(c4702.36,2720.03) Designator1.64@4702.36,2701.97 ; 4692.23,2622.64 ccw(c4692.23,2637.77) v1@4702.93,2627.07 ; Designator1.64@4701.72,2667.27 cw(c4688.11,2653.66) 4707.36,2653.66 ; Designator1.64@4701.81,2667.2 cw(c4696.55,2660.38) 4705.16,2660.38 ; Designator1.64@4703.24,2667.7 ccw(c4710.26,2666.02) 4705.16,2660.92 ; Designator1.64@4703.27,2667.91 ccw(c4715.6,2667.91) 4706.88,2659.2 ; Designator1.64@4705.16,2691.69 4705.16,2660.92 ; v1@4740,2405 cw(c4715.86,2405) 4732.93,2387.93 cw(c4750,2370.86) v1@4750,2395 ; Designator1.19@4741.09,2282.73 ccw(c4732.8,2291.02) 4744.53,2291.02 ; 4744.53,2367.65 cw(c4787.35,2367.65) v1@4757.07,2397.93 ; v1@4910,3380 cw(c4910,3355.86) 4927.07,3372.93 cw(c4944.14,3390) v1@4920,3390 ; v1(4910,3390) 4950,3350 1K.2@4950,3340 ; 4929.4,3370.6 cw(c4903.79,3345) 1K.2@4940,3345 ; v1(4935,2605) 4970,2640 5015.76,2640 5035.92,2619.84 ; v1@4935,2615 ccw(c4935,2639.14) 4952.07,2622.07 ccw(c4969.14,2605) v1@4945,2605 ; 1K.2@4941.46,3358.54 ccw(c4950,3367.07) 1K.2@4950,3355 ; v1@4987.93,2332.93 cw(c4970.86,2315.86) 4995,2315.86 cw(c5019.14,2315.86) v1@5002.07,2332.93 ; Designator1.32@4995,2258.15 v1(4995,2340) ; 4995,2290.64 ccw(c5006.19,2290.64) Designator1.32@4998.28,2282.73 ; Designator1.32@4997.64,2228.03 cw(c4997.64,2161.69) 5044.55,2208.6 ; Designator1.32@4997.64,2238.03 cw(c4997.64,2195.83) 5027.48,2225.67 ; Designator1.32@4997.64,2248.03 cw(c4997.64,2229.97) 5010.41,2242.74 ; Designator1.32 5125,2128.15 4.7K.2 ; 5024.65,2631.11 ccw(c5042.91,2649.37) Designator1.48@5042.91,2623.54 ; Designator1.48@5042.16,2623.15 cw(c5035.92,2627.4) 5035.92,2619.84 ; Designator1.48@5066.69,2619.84 5035.92,2619.84 ; Designator1.48 5285,2838.15 JTAG.1 ; Designator1.48@5076.97,2622.64 cw(c5095.03,2622.64) 5082.26,2635.41 ; Designator1.48@5086.97,2622.64 cw(c5129.17,2622.64) 5099.33,2652.48 ; Designator1.48@5096.97,2622.64 cw(c5163.31,2622.64) 5116.4,2669.55 ; 4.7K.2@5117.93,2102.07 ccw(c5100.86,2119.14) 5125,2119.14 ccw(c5149.14,2119.14) 4.7K.2@5132.07,2102.07 ; JTAG.1@5267.66,2927.66 cw(c5225.79,2885.79) 5285,2885.79 cw(c5344.21,2885.79) JTAG.1@5302.34,2927.66 ; JTAG.1@5274.73,2934.73 cw(c5249.93,2909.93) 5285,2909.93 cw(c5320.07,2909.93) JTAG.1@5295.27,2934.73
  Bottom Layer w10: 4480,3173.82 4619.73,3313.54 4771.15,3313.54 4847.61,3390 v1(4910,3390) ; v1@4902.93,3382.93 ccw(c4885.86,3365.86) 4885.86,3390 ccw(c4885.86,3414.14) v1@4902.93,3397.07 ; 10uf.1@4985.64,2336.47 ccw(c5005.07,2343.8) 10uf.1@4999.7,2323.74 ; 10uf.1@4995,2325 cw(c4995,2288.79) 5020.61,2314.39 ; 10uf.1@4995,2330 cw(c4995,2305.86) 5012.07,2322.93 cw(c5029.14,2340) 10uf.1@5005,2340 ; v1(4995,2340) 5255,2080 10K.1 ; 10uf.1@5005,2335 ccw(c5017.07,2335) 10uf.1@5008.53,2326.46 ; 10K.1@5247.93,2002.07 ccw(c5230.86,2019.14) 5255,2019.14 ccw(c5279.14,2019.14) 10K.1@5262.07,2002.07
  Bottom Layer w30: 10nF.2 4689.68,3025 4854.68,3190 5075,3190 5110,3155 5110,2650 5020,2560 4975.32,2560 VDDA1.1@4935,2600.32 ; v1(4710,2620) VDDA1.1@4920,2620 ; v1@4750,2404.68 10uf.1@4795,2404.68 ; 10uf.1@4770,2325 4795,2350 10uf.1@4795,2404.68 ; 10uf.1@4770,2330 ccw(c4709.64,2390.36) 10uf.1@4795,2390.36 ; 10uf.1@4795,2405 10uf.1@4795,2404.68 ; 4898.79,2620 cw(c4898.79,2568.79) v1(4935,2605) VDDA1.1@4935,2600.32 ; 4910.86,2620 cw(c4910.86,2585.86) VDDA1.1@4935,2610 ; v1(4995,2340) 4995,2344.68 4935,2404.68 ; 10uf.1@4795,2404.68 4935,2404.68 ; 4935,2404.68 VDDA1.1@4935,2600.32
  Bottom Layer w50: 117_3.3.2 100nf.1@4274.45,3360.55 ; 100nf.1@4275,3360 4293.82,3360 4480,3173.82 4480,3080 4535,3025 10uF.2 10nF.2
  other v1: 4750,2405
VCC_5V: 10uf.1@3510,3380 10uf.1@3945,3580 100nf.1@3590,3380 104.1@3865.04,3580 117_3.3.3 AMS117-5.2 AMS117-5.4 BM1.10 BM2.10 BM3.10 BM4.10 M1-M2.1 M3-M4.1 | length 7248.8
  Top Layer w50: AMS117-5.2 AMS117-5.4@3852.87,3514.45 ; AMS117-5.4@3863.43,3525 v1(3925,3525) ; AMS117-5.4@3863.8,3504.86 cw(c3912.41,3456.25) v1@3912.41,3525
  Bottom Layer w50: 3455,2475 BM3.10 ; 3455,2865 BM2.10 ; BM4.10 3454.02,2085.98 3454.02,3245.98 ; BM1.10 3454.02,3245.98 ; 117_3.3.3@3726.37,3434.74 cw(c3755,3406.12) 117_3.3.3@3755,3446.6 ; 117_3.3.3@3779.5,3451.1 cw(c3868.27,3451.1) 3805.5,3513.87 ; 104.1@3867.19,3589.59 cw(c3878.05,3553.05) 3905,3580 ; 104.1@3870.04,3590 cw(c3870.04,3529.74) 3912.65,3572.35 ; 3917.32,3567.68 cw(c3874.64,3525) v1@3935,3525 ; v1@3934.58,3522.15 ccw(c3898.03,3533.03) 3925,3560 ; 10uf.1@3942.86,3570.42 cw(c3931.97,3606.97) 3905,3580 ; M1-M2.1 5700.48,2445.48 5700.48,2840.48 ; M3-M4.1 5700.48,2840.48 ; 3454.02,3245.98 3454.02,3343.19 3486.81,3375.98 3505.98,3375.98 3510,3380 3590,3380 3671.63,3380 3871.63,3580 3905,3580 ; 3905,3580 3925,3560 ; 3925,3560 v1(3925,3525) 4075.98,3525 4360,3809.02 5450.98,3809.02 5700.48,3559.52 5700.48,2840.48 ; 3925,3567.93 cw(c3952.07,3567.93) 10uf.1@3932.93,3587.07 ; 3925,3567.93 cw(c3952.07,3567.93) 10uf.1@3932.93,3587.07 ; 3925,3567.93 cw(c3952.07,3567.93) 10uf.1@3932.93,3587.07
VCC_9V: 10uf.1@3400,3460 104.1@3485,3460 AMS117-5.3 LM2596.3 U4.4 | length 3278
  Top Layer w50: LM2596.3 3005,3595 3140,3460 ; 3550.06,3444.94 ccw(c3590,3484.89) AMS117-5.3@3590,3428.4 ; AMS117-5.3 3571.1,3423.9 3535,3460 3140,3460 ; U4.4 4820.89,3135 4774.91,3089.02 4546.99,3089.02 4501,3135 3465,3135 3140,3460
VCC_12V: LM2596.1 POWER.1 | length 959.7
  Top Layer w50: LM2596.1 2930,1505 3048.35,1505 POWER.1 ; POWER.1@3139.13,1620 cw(c3080.68,1620) 3122.01,1578.67 cw(c3163.35,1537.33) POWER.1@3163.35,1595.79
XTAL1: 8MHZ.1 22PF.2@4400,2555 Designator1.5 | length 616.8
  Top Layer w10: 22PF.2@4400,2555 8MHZ.1@4470,2555 ; 22PF.2@4402.58,2555 ccw(c4402.58,2632.42) 8MHZ.1@4457.32,2577.68 ; 22PF.2@4410,2563.66 ccw(c4421,2582.71) 4426.69,2561.46 ; 22PF.2@4412.07,2547.93 cw(c4429.14,2530.86) 4429.14,2555 cw(c4429.14,2579.14) 22PF.2@4412.07,2562.07 ; 22PF.2@4413.66,2550 cw(c4436.42,2536.86) 4429.62,2562.25 ; 8MHZ.1@4457.32,2542.32 ccw(c4426.71,2511.71) 4426.71,2555 ccw(c4426.72,2608.28) 8MHZ.1@4464.39,2570.61 ; 8MHZ.1 4583.63,2560 4596.94,2546.69 ; 8MHZ.1@4485.61,2549.39 cw(c4511.21,2523.79) 4511.21,2560 cw(c4511.21,2596.21) 8MHZ.1@4485.61,2570.61 ; 8MHZ.1@4492.68,2542.32 cw(c4535.36,2499.64) 4535.36,2560 cw(c4535.36,2620.36) 8MHZ.1@4492.68,2577.68 ; 4595.22,2548.41 ccw(c4603.94,2557.13) Designator1.5@4603.94,2544.8 ; Designator1.5@4603.19,2543.39 ccw(c4596.94,2539.14) 4596.94,2546.69 ; Designator1.5@4603.73,2544.78 cw(c4602.04,2551.79) 4596.94,2546.69 ; Designator1.5@4627.72,2546.69 4596.94,2546.69
XTAL2: 8MHZ.2 22PF.2@4400,2360 Designator1.6 | length 761.9
  Top Layer w10: 22PF.2@4400,2360 8MHZ.2 4475,2430 4566.42,2521.42 Designator1.6@4627.72,2521.42 ; 22PF.2@4410,2351.34 cw(c4426.33,2323.05) 4434.79,2354.6 ; 22PF.2@4410,2368.66 ccw(c4426.33,2396.95) 4434.79,2365.4 ; 22PF.2@4412.07,2352.93 cw(c4429.14,2335.86) 4429.14,2360 cw(c4429.14,2384.14) 22PF.2@4412.07,2367.07 ; 22PF.2@4413.66,2355 cw(c4427.19,2347.19) 4423.15,2362.28 ; 22PF.2@4413.66,2365 ccw(c4427.19,2372.81) 4423.14,2357.72 ; 8MHZ.2@4457.32,2342.32 ccw(c4414.65,2299.65) 4414.65,2360 ccw(c4414.64,2420.36) 4457.32,2377.68 ccw(c4414.64,2420.36) 4475,2420.36 ccw(c4535.36,2420.36) 8MHZ.2@4492.68,2377.68 ; 8MHZ.2@4464.39,2349.39 ccw(c4438.79,2323.79) 4438.79,2360 ccw(c4438.78,2396.22) 4464.39,2370.61 ccw(c4438.79,2396.21) 4475,2396.21 ccw(c4511.21,2396.21) 8MHZ.2@4485.61,2370.61 ; 4595,2521.42 ccw(c4595,2533.15) Designator1.6@4603.3,2524.85
pads on no net: BM1.1 BM1.3 BM1.4 BM1.5 BM1.6 BM1.9 BM2.1 BM2.3 BM2.4 BM2.5 BM2.6 BM2.9 BM3.1 BM3.3 BM3.4 BM3.5 BM3.6 BM3.9 BM4.1 BM4.3 BM4.4 BM4.5 BM4.6 BM4.9 CANH_CANL.3 Designator1.2 Designator1.3 Designator1.4 Designator1.8 Designator1.9 Designator1.10 Designator1.11 Designator1.20 Designator1.21 Designator1.24 Designator1.29 Designator1.30 Designator1.45 Designator1.57 Designator1.60 M1-M2.6 M1-M2.10 M3-M4.6 M3-M4.10

## Polygon pours and split planes (outlines as drawn)
GND on Top Layer "Top Layer-No Net" (solid, remove dead copper, pour order 2): 2175,4020 2285,3910 6330,3910 6330,1375 6250,1295 6115,1430 2240,1430
GND on Bottom Layer "Top Layer-No Net" (solid, remove dead copper, pour order 4): 1890,4085 6395,4085 6625,3855 6155,3385 6155,1305 1980,1305 1960,1325

## Keep-outs
Keep-Out Layer:
  lines w10: 2410,1460 5895,1460 5895,3845 2410,3845 2410,1460